# Altium PCB PCB1.PcbDoc (part 3 of 3)
Units mm, origin at the board's own origin, x right, y up, seen from the top; angles counter-clockwise.
Board outline 44.87 x 32.17 mm, 6 copper layers (Top Side, Inner Layer 1(GND), Inner Layer 2, Inner Layer 3, Inner Layer 4(GND), Bottom Side), stack 1.618 mm thick; 40 components, 39 nets, 233 pads, 118 vias.
Unrouted connection lines stored in the file: 1.
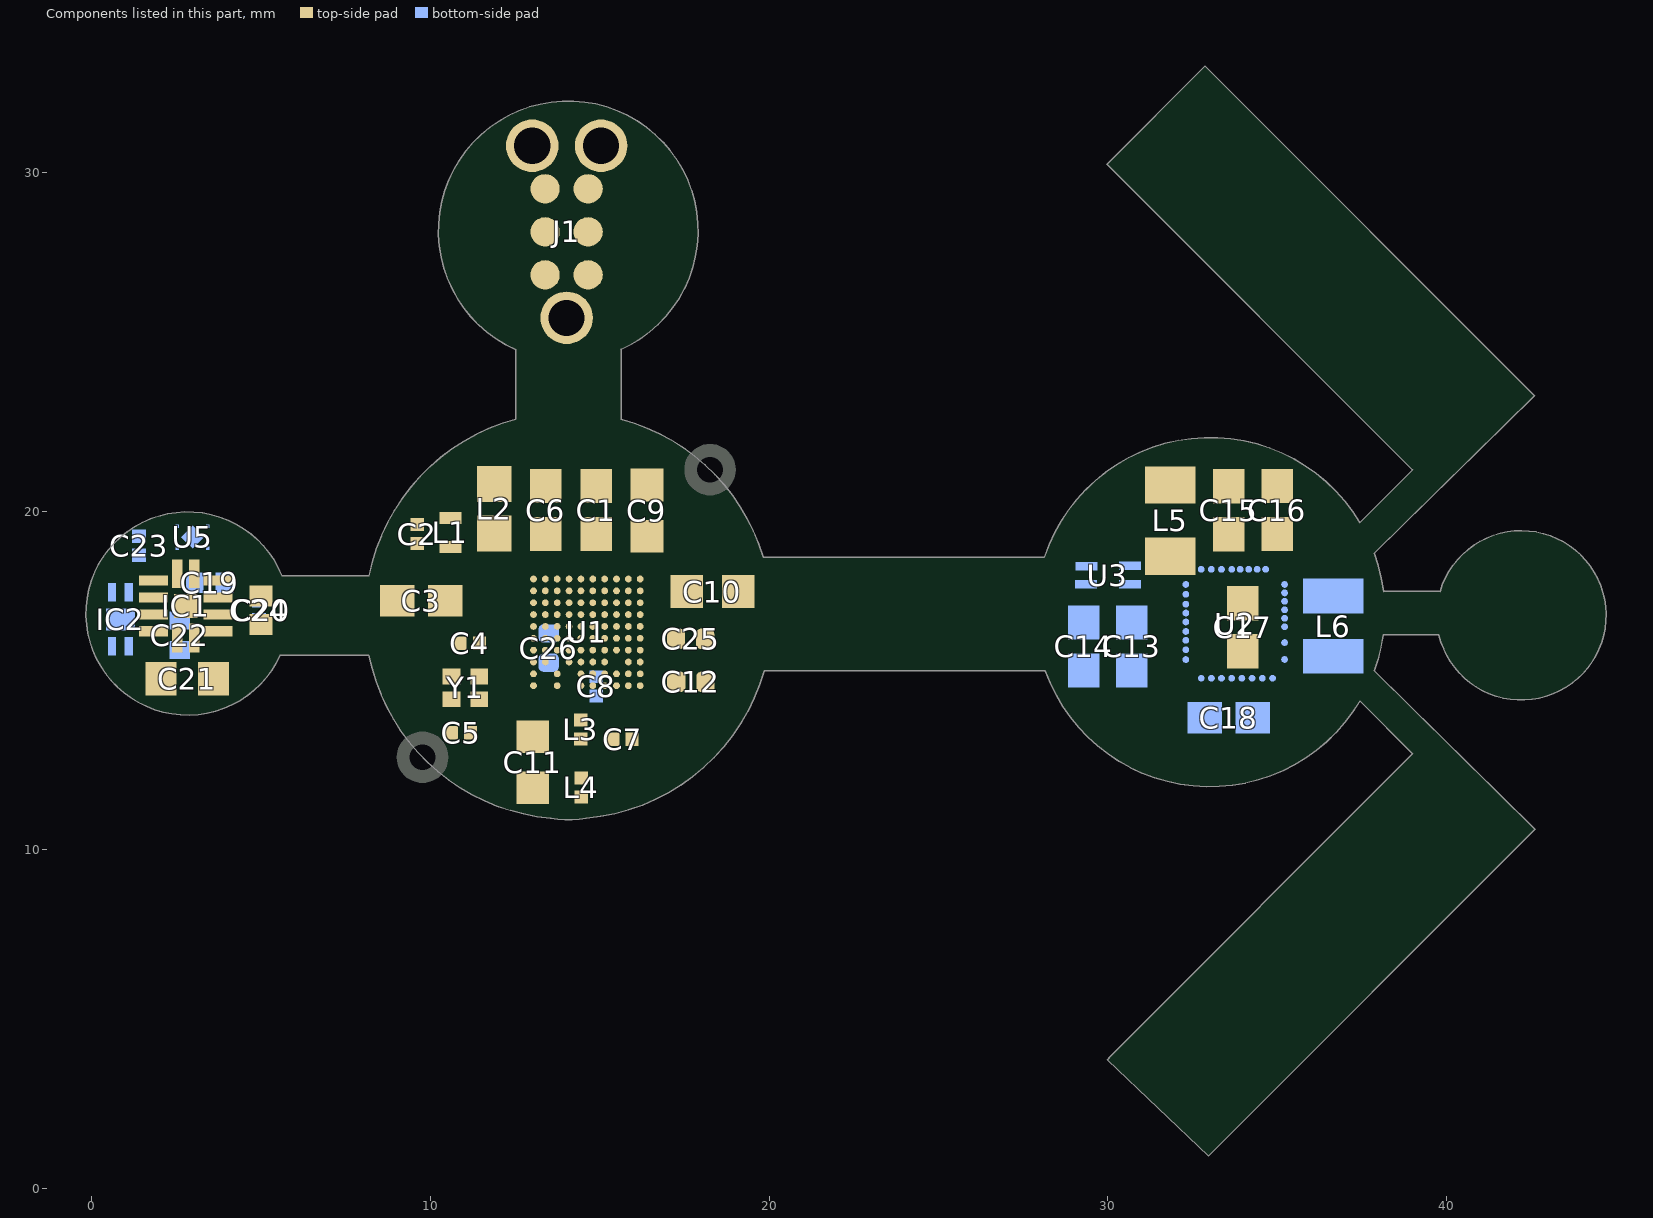
[diagram p6: the components of this part, seen from the top]

## Other copper
Top Side:
  pour cut-out: 19.823,18.644 19.823,18.588 19.852,15.283 28.155,15.283 28.127,15.311 28.127,18.644
  pour cut-out: 12.526,24.771 15.625,24.771 15.625,22.716 15.628,22.713 12.521,22.713 12.521,24.766
  pour cut-out: 5.62,18.085 8.186,18.085 8.186,15.749 8.185,15.748 8.184,15.749 5.569,15.749 5.569,18.035
Inner Layer 2:
  pour cut-out: 37.438,14.392 37.753,15.019 37.866,15.283
Bottom Side:
  pour cut-out: 37.438,14.392 37.753,15.019 37.866,15.283
  pour cut-out: 19.823,18.644 19.852,15.283 28.155,15.283 28.127,15.311 28.127,18.644
  pour cut-out: 12.521,24.766 15.625,24.771 15.625,22.716 15.628,22.713 12.521,22.713
  pour cut-out: 5.62,18.085 8.186,18.085 8.186,15.749 8.185,15.748 8.184,15.749 5.569,15.749 5.569,18.035